# Altium PCB programmer.PcbDoc
Units mm, origin at the board's own origin, x right, y up, seen from the top; angles counter-clockwise.
Board outline 19.5 x 25.5 mm, 2 copper layers (Top Layer, Bottom Layer), stack 0.771 mm thick; 12 components, 12 nets, 78 pads, 16 vias.
Unrouted connection lines stored in the file: 3.
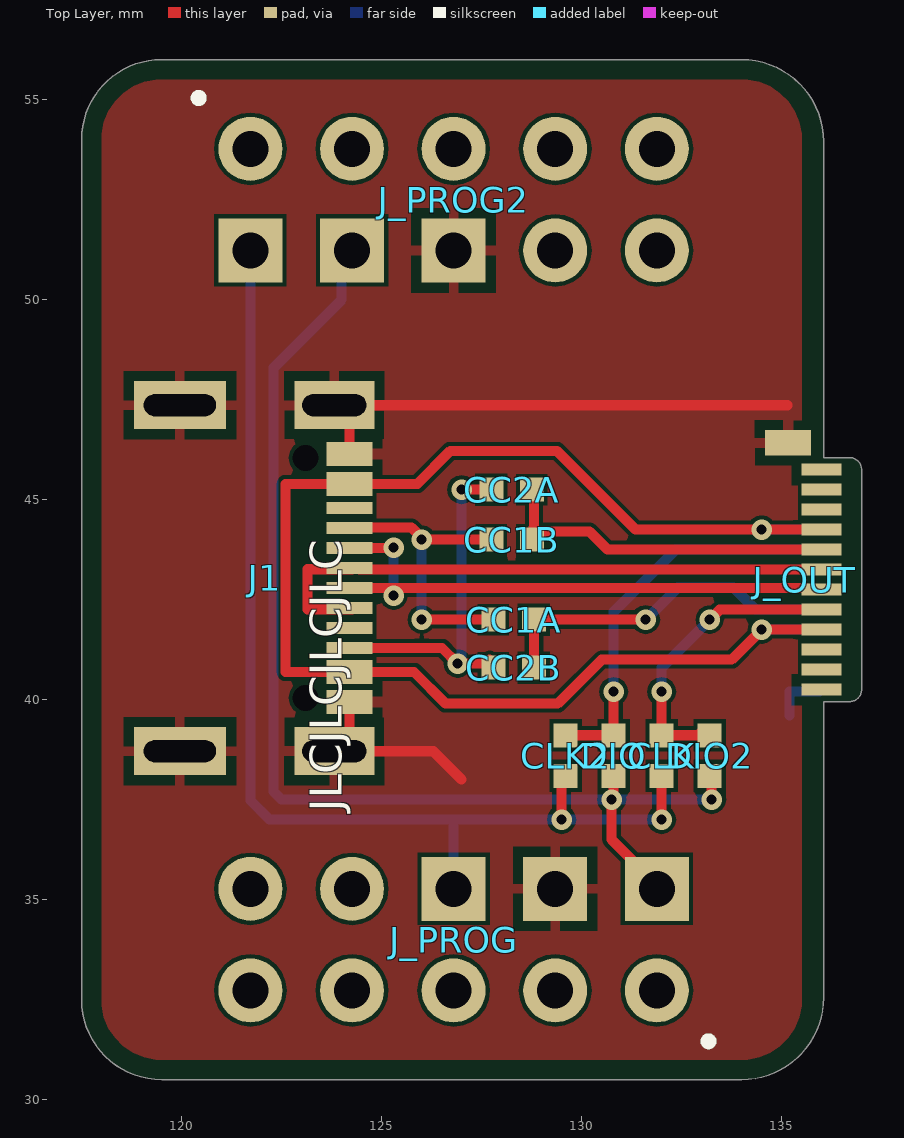
[diagram p0: Top Layer view]
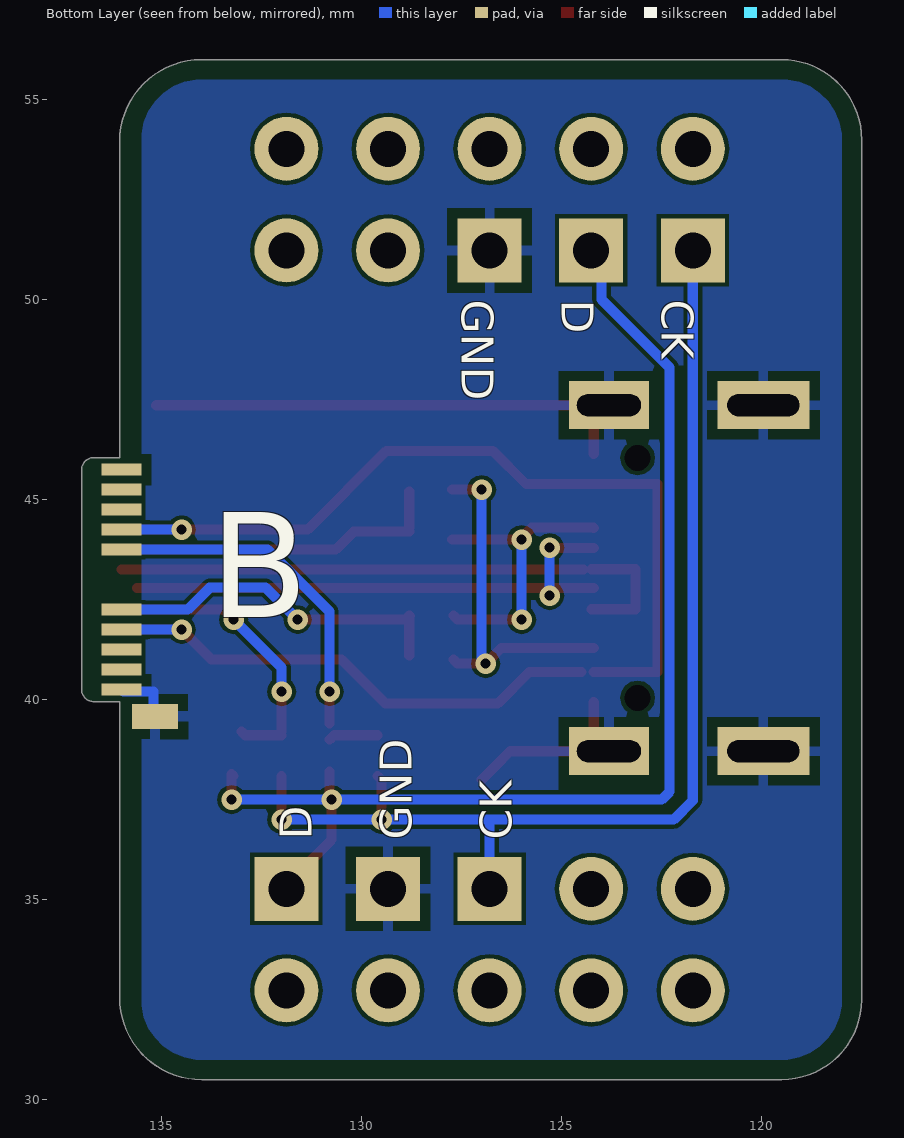
[diagram p1: Bottom Layer view, seen from below]
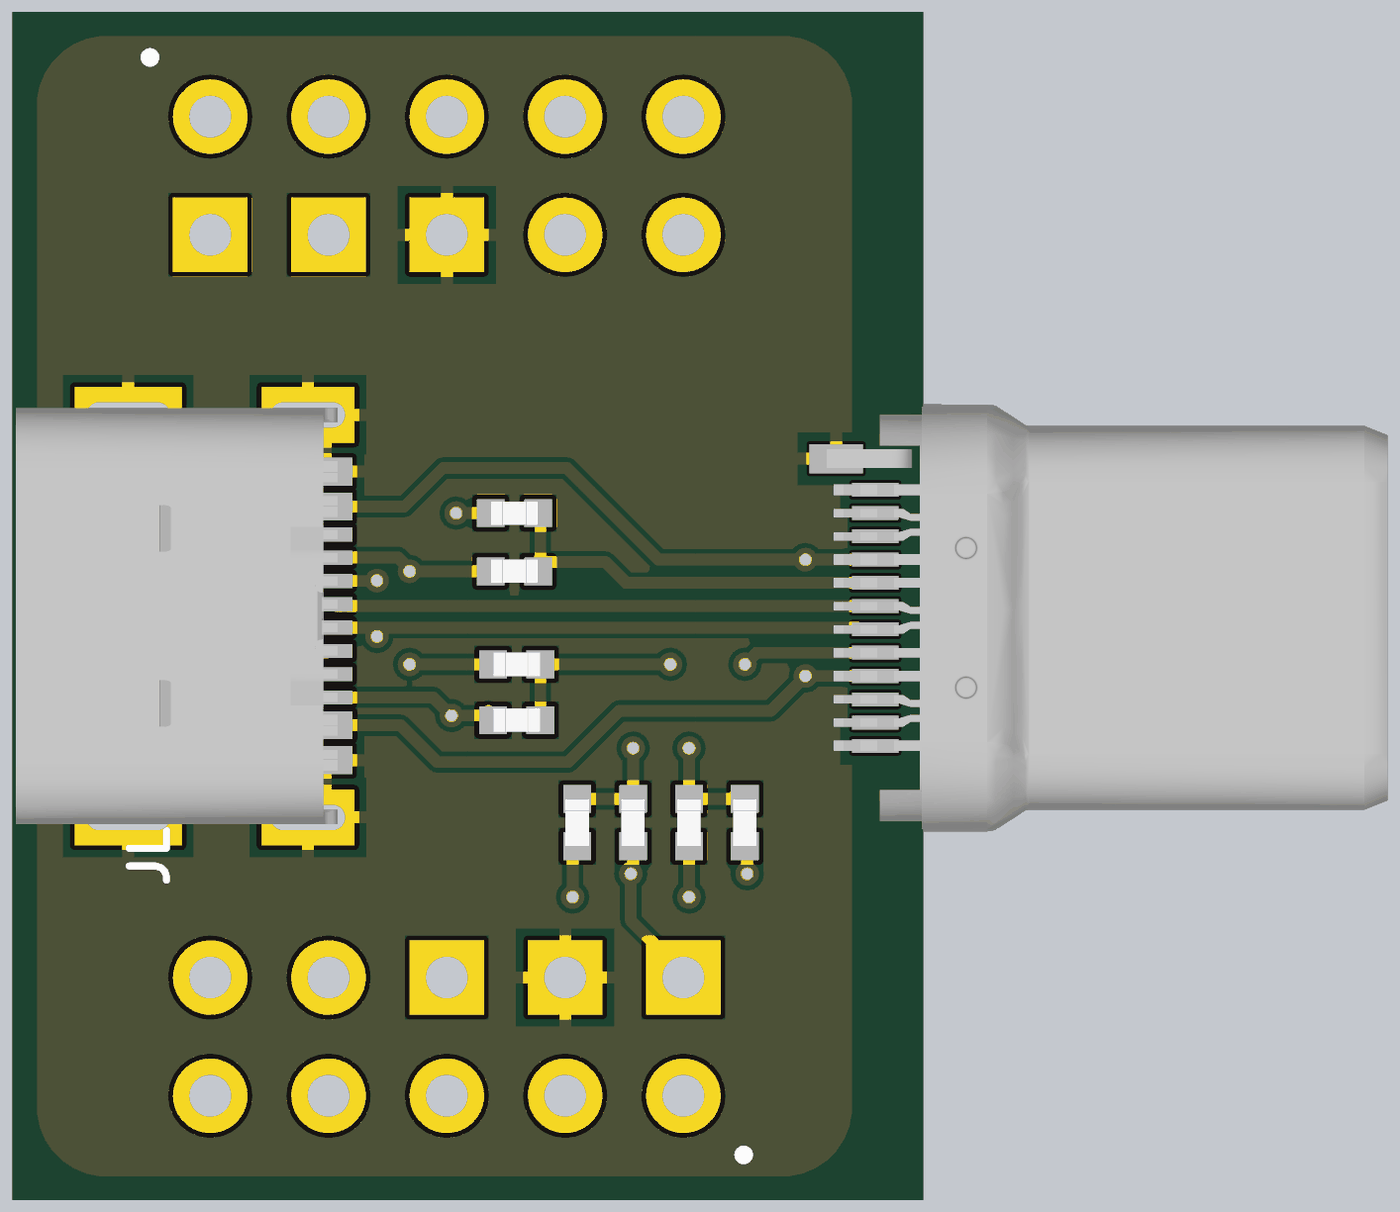
[diagram p2: 3D render of the assembled board from above, using the file's embedded part models]

## Layer stack, top to bottom
Top Solder: solder mask 0.0102, Solder Resist, Dk 3.5
Top Layer: signal copper 0.0356
Dielectric 1: dielectric 0.7, FR-4, Dk 4.8
Bottom Layer: signal copper 0.0356
Bottom Solder: solder mask 0.0102, Solder Resist, Dk 3.5

## Board outline
119.5,30.5 134,30.5 ccw(c134,32.55) 136.05,32.55 136.05,39.95 136.7,39.95 ccw(c136.7,40.25) 137,40.25 137,45.75 ccw(c136.7,45.75) 136.7,46.05 136.05,46.05 136.05,53.95 ccw(c134,53.95) 134,56 119.5,56 ccw(c119.5,54) 117.5,54 117.5,32.5 ccw(c119.5,32.5)

## Design rules (kind name [scope] priority, off if disabled: settings)
Clearance [All] p1: gap=0.1 ignorepadtopadclearanceinfootprint=FALSE
PolygonConnect [All] p1: connectstyle=Relief reliefconductorwidth=0.254 reliefentries=4 polygonreliefangle="90 Angle" airgapwidth=0.254
RoutingVias [All] p1: holewidth=0.711 width=1.27 viastyle="Through Hole" minholewidth=0.711 minwidth=1.27 maxholewidth=0.711 maxwidth=1.27
SolderMaskExpansion [All] p1: expansion=0.102
Width [All] p1: maxlimit=0.254 minlimit=0.254 preferedwidth=0.254
30 further rules are at their usual default settings.

## Components (designator, comment, footprint, x,y, rotation, side; value= is the part's Value field where it differs from the comment)
CC1A "0402WGF0000TCE" R_0402 128.3,42 r0 top value=0R
CC1B "0402WGF0000TCE" R_0402 128.25,44 r0 top value=0R
CC2A "0402WGF0000TCE" R_0402 128.25,45.25 r0 top value=0R
CC2B "0402WGF0000TCE" R_0402 128.3,40.8 r0 top value=0R
CLK "0402WGF0000TCE" R_0402 132,38.6 r90 top value=0R
CLK2 "0402WGF0000TCE" R_0402 129.6,38.6 r90 top value=0R
DIO "0402WGF0000TCE" R_0402 130.8,38.6 r270 top value=0R
DIO2 "0402WGF0000TCE" R_0402 133.2,38.6 r90 top value=0R
J1 "918-418K2023S40001" DX07S016JA1R1500 120.9,43.041 r270 top
J_OUT "1054440011" MOLEX_1054440011 137,43 r90 top
J_PROG "DS1023-2*5SF11" HDR_FEM_2X5P 126.8,34 r180 top
J_PROG2 "DS1023-2*5SF11" HDR_FEM_2X5P 126.8,52.5 r0 top

## Footprints (in the part's own frame and the unit in brackets; to place one, negate y for a bottom-side part, rotate by r counter-clockwise, add the part's x,y. Pads: shape width x height; smd on the part's side, far side on the other; paste and mask are expansions set on the pad)
DX07S016JA1R1500 [mm] "USB-C (USB TYPE-C) USB 2.0 Receptacle Connector 24 (16+8 Dummy) Position Surface Mount, Right Angle"
  rect 1.2x2 hole 0.55 slot 1.6 at 90 deg: 0(-4.32,2.917) 0(4.33,2.917)
  rect 1.2x2.3 hole 0.55 slot 1.8 at 90 deg: 0(-4.32,-0.943) 0(4.33,-0.943)
  rect 0.6x1.15 smd: A1_B12(-3.1,3.297) A4_B9(-2.35,3.297) A9_B4(2.35,3.3) A12_B1(3.1,3.297)
  rect 0.3x1.15 smd: A5(-1.25,3.297) A6(-0.25,3.297) A7(0.25,3.3) A8(1.25,3.297) B5(1.75,3.297) B6(0.75,3.297) B7(-0.75,3.297) B8(-1.75,3.297)
  round 0 hole 0.65 unplated: M(-3,2.2) M(3,2.2)
  body extent -4.47,-3.35 4.47,3.55, height 3.18
HDR_FEM_2X5P [mm] "10 Pin 2 Row Header"
  round 1.6 hole 0.9: 1(-5.08,1.27) 3(-2.54,1.27) 5(0,1.27) 7(2.54,1.27) 8(2.54,-1.27) 9(5.08,1.27) 10(5.08,-1.27)
  rect 1.6x1.6 hole 0.9: 2(-5.08,-1.27) 4(-2.54,-1.27) 6(0,-1.27)
  silkscreen extent -6.47,2.44 -6.27,2.64
MOLEX_1054440011 [mm]
  rect 0.298x1 smd mask+0.064: A1(2.75,1) A2(2.25,1) A3(1.75,1) A4(1.25,1) A5(0.75,1) A6(0.25,1) A7(-0.25,1) A8(-0.75,1) A9(-1.25,1) A10(-1.75,1) A11(-2.25,1) A12(-2.75,1)
  rect 0.298x1 smd far side mask+0.064: B1(-2.75,1) B2(-2.25,1) B3(-1.75,1) B4(-1.25,1) B5(-0.75,1) B8(0.75,1) B9(1.25,1) B10(1.75,1) B11(2.25,1) B12(2.75,1)
  rect 0.63x1.15 smd mask+0.064: SH1(3.42,1.84)
  rect 0.63x1.15 smd far side mask+0.064: SH2(-3.42,1.84)
  body extent -4.59,-10 4.59,2.04, height 1.52
R_0402 [mm] "Body 1.0 x 0.5 mm (LxW typ)"
  rect 0.6x0.6 smd: 1(-0.508,0) 2(0.508,0)
  body extent -0.5,-0.25 0.5,0.25, height 0.35

## Part data
CC1A CC1B CC2A CC2B CLK CLK2 DIO DIO2: "R - RESISTOR - SMD - 0R - 1% - 0402", JLC Availability=Basic, LCSC Part #=C17168
J1: "J - JACK - USB - Type C - Recepticle - SMT - 90°", JLC Availability=LCSC, LCSC Part #=C167321
J_OUT: "J - JACK - Universal Serial Bus (USB) Shielded I/O Plug, Type C, Right-Angle, Surface Mount, 0.76m Gold (Au) Plating, Tape and Reel", JLC Availability=Extended, LCSC Part #=C561769, Check_prices=https://www.snapeda.com/parts/1054440011/Molex/view-part/?ref=eda, MF=Molex, MP=1054440011
J_PROG J_PROG2: "J - JACK - PIN_HEADER 2X5P", JLC Availability=Extended, LCSC Part #=C125068

## Via types
v1: diameter 0.508, hole 0.254, Top Layer to Bottom Layer, tented both sides, 16 vias

## Nets (pads, with @x,y where several pads share a name; then routed paths per layer and width w, separated by ;. In a path a pad name is that pad's centre, name@x,y a point inside that pad or via, vN(x,y) a via of type N, cw(c..) or ccw(c..) an arc to the next point about the centre after c; other vN are vias at no path point)
CC1_IN: CC1A.1 CC1B.1 J1.A5 | length 7.4
  Top Layer w0.254: J1.A5 124.206,44.3 125.75,44.3 126,44.05 v1(126,44) CC1B.1 ; v1(126,42) 127.6,42 CC1A.1@127.7,42.1
  Bottom Layer w0.254: v1(126,42) v1(126,44)
CC1_OUT: CC1A.2 CC2B.2 J_OUT.B5 | length 8.8
  Top Layer w0.254: CC1A.2@128.792,42.092 CC1A.2@128.808,42.092 ; 128.808,41.1 CC1A.2 ; CC1A.2@128.808,42.1 CC1A.2@128.808,42.092 ; v1(131.6,42) CC1A.2 ; CC1A.2 CC1A.2@128.808,42.092
  Bottom Layer w0.254: v1(131.6,42) 132.4,42.8 133.8,42.8 134.35,42.25 J_OUT.B5
CC2_IN: CC2A.1 CC2B.1 J1.B5 | length 8.8
  Top Layer w0.254: J1.B5 126.509,41.291 v1(126.9,40.9) 127.6,40.9 CC2B.1@127.7,41 ; v1(127,45.25) CC2A.1
  Bottom Layer w0.254: v1(126.9,40.9) 127,41 v1(127,45.25)
CC2_OUT: CC1B.2 CC2A.2 J_OUT.A5 | length 8.4
  Top Layer w0.254: CC1B.2@128.8,44.2 128.808,44.2 CC1B.2@128.9,44.2 ; 128.8,44.3 CC1B.2@128.808,44.292 ; CC2A.2@128.808,45.2 CC1B.2@128.808,44.292 ; J_OUT.A5 130.65,43.75 130.2,44.2 CC1B.2@128.9,44.2 ; CC1B.2@128.808,44.292 CC1B.2@128.9,44.2
CLK: CLK2.1 CLK.1 J_PROG2.2 J_PROG.6 | length 28.2
  Top Layer w0.254: v1(129.5,37) 129.5,37.992 CLK2.1 ; v1(132,37) CLK.1
  Bottom Layer w0.254: J_PROG2.2 121.72,37.48 122.2,37 126.8,37 ; J_PROG.6 126.8,37 ; v1(132,37) v1(129.5,37) 126.8,37
DIO: DIO2.1 DIO.2 J_PROG2.4 J_PROG.2 | length 28.4
  Top Layer w0.254: v1(130.75,37.5) v1@130.75,37.45 ; DIO.2@130.8,38.2 DIO.2 130.8,37.4 v1@130.75,37.45 ; J_PROG.2@131.5,35.75 130.75,36.5 v1@130.75,37.45 ; DIO2.1 133.25,38.142 v1(133.25,37.5)
  Bottom Layer w0.254: J_PROG2.4@124,51 124,50 122.3,48.3 122.3,37.7 122.5,37.5 v1(130.75,37.5) v1@133,37.5
GND: J1.0 J1.A1_B12 J1.A12_B1 J_OUT.A1 J_OUT.A12 J_OUT.B1 J_OUT.B12 J_OUT.SH1 J_OUT.SH2 J_PROG2.6 J_PROG.4 | length 19
  Top Layer w0.254: J1.A12_B1 124.197,39.091 123.817,38.711 126.289,38.711 126.65,38.35 127,38 ; J1.A1_B12 124.197,46.981 123.817,47.361 135.139,47.361
  Bottom Layer w0.254: J_OUT.SH2@135.2,39.6 135.2,40.2 135.95,40.2 J_OUT.B1
SBU1: CLK.2 DIO2.2 J_OUT.A8 | length 7.2
  Top Layer w0.254: CLK.2 132.908,39.108 DIO2.2@133,39.2 ; CLK.2@132,39.2 v1(132,40.2) ; v1(133.2,42) 133.45,42.25 J_OUT.A8
  Bottom Layer w0.254: v1(132,40.2) 132,40.8 v1(133.2,42)
SBU2: CLK2.2 DIO.1 J_OUT.B8 | length 9.9
  Top Layer w0.254: CLK2.2 130.692,39.108 DIO.1@130.8,39 ; DIO.1@130.8,39.4 v1(130.8,40.2)
  Bottom Layer w0.254: v1(130.8,40.2) 130.8,42.2 132.35,43.75 J_OUT.B8
USB_DM: J1.A7 J1.B7 J_OUT.A7 | length 13.7
  Top Layer w0.254: J1.A7@124.197,42.791 J_OUT.A7@135.609,42.791 ; J1.B7 v1@125.3,43.791
  Bottom Layer w0.254: v1(125.3,42.6) v1(125.3,43.8)
USB_DP: J1.A6 J1.B6 J_OUT.A6 | length 14.8
  Top Layer w0.254: J1.B6@124.253,42.259 123.15,42.259 123.15,43.259 J1.A6@124.253,43.259 ; J1.A6@124.45,43.25 J_OUT.A6
VCC_5V: J1.A4_B9 J1.A9_B4 J_OUT.A4 J_OUT.A9 J_OUT.B4 J_OUT.B9 | length 36.2
  Top Layer w0.254: J1.A9_B4 122.6,40.691 122.6,45.391 J1.A4_B9 125.891,45.391 126.719,46.219 129.381,46.219 131.35,44.25 J_OUT.A4 ; J1.A9_B4@124.5,40.691 125.809,40.691 126.6,39.9 129.4,39.9 130.5,41 133.75,41 v1(134.5,41.75) J_OUT.A9 J_OUT.A9@136.25,41.75
  Bottom Layer w0.254: v1@134.75,41.75 J_OUT.B4 ; v1@134.75,44.25 J_OUT.B9
  other v1: 134.5,44.25
pads on no net: J1.A8 J1.B8 J1.M J_OUT.A2 J_OUT.A3 J_OUT.A10 J_OUT.A11 J_OUT.B2 J_OUT.B3 J_OUT.B10 J_OUT.B11 J_PROG2.1 J_PROG2.3 J_PROG2.5 J_PROG2.7 J_PROG2.8 J_PROG2.9 J_PROG2.10 J_PROG.1 J_PROG.3 J_PROG.5 J_PROG.7 J_PROG.8 J_PROG.9 J_PROG.10

## Polygon pours and split planes (outlines as drawn)
no net on Bottom Layer "Bottom Layer-No Net" (solid, pour order 8): 148.45,32.9
GND on Bottom Layer "Bottom Layer-GND" (solid, pour order 4): 118,32.5 118,54 cw(c119.5,54) 119.5,55.5 134,55.5 cw(c134,54) 135.5,54 135.5,32.5 cw(c134,32.5) 134,31 119.5,31 cw(c119.5,32.5)
GND on Bottom Layer "Bottom Layer-GND 1" (solid, pour order 2): 128.1,36.5
GND on Top Layer "Top Layer-GND" (solid, pour order 0): 118,32.5 118,54 cw(c119.5,54) 119.5,55.5 134,55.5 cw(c134,54) 135.5,54 135.5,32.5 cw(c134,32.5) 134,31 119.5,31 cw(c119.5,32.5)

## Silkscreen, mask and mechanical layers (free items; w line width, h text height)
Top Overlay:
  text "JLCJLCJLCJLC" at 124,37.2 h0.8 r90
Bottom Overlay:
  text "CK" at 122.5,50 h0.8 r90
  text "D" at 125,50 h0.8 r90
  text "GND" at 127.5,50 h0.8 r90
  text "B" at 133.8,41.2 h4.5
  text "CK" at 126.25,36.5 h0.8 r270
  text "GND" at 128.75,36.5 h0.8 r270
  text "D" at 131.25,36.5 h0.8 r270
Board Outline (M30):
  the board outline again, w0.1

## Text inside footprints (layer, text, board x,y; h text height)
J_OUT: Mechanical 13 "PCB Edge" at 136.683,48.08 h1 r90